# Altium PCB Template_Manufact.PcbDoc (part 1 of 2)
Units mm, origin at the board's own origin, x right, y up, seen from the top; angles counter-clockwise.
Board outline 196 x 280 mm, 2 copper layers (Top Layer, Bottom Layer); 129 components, 42 nets, 507 pads, 102 vias.
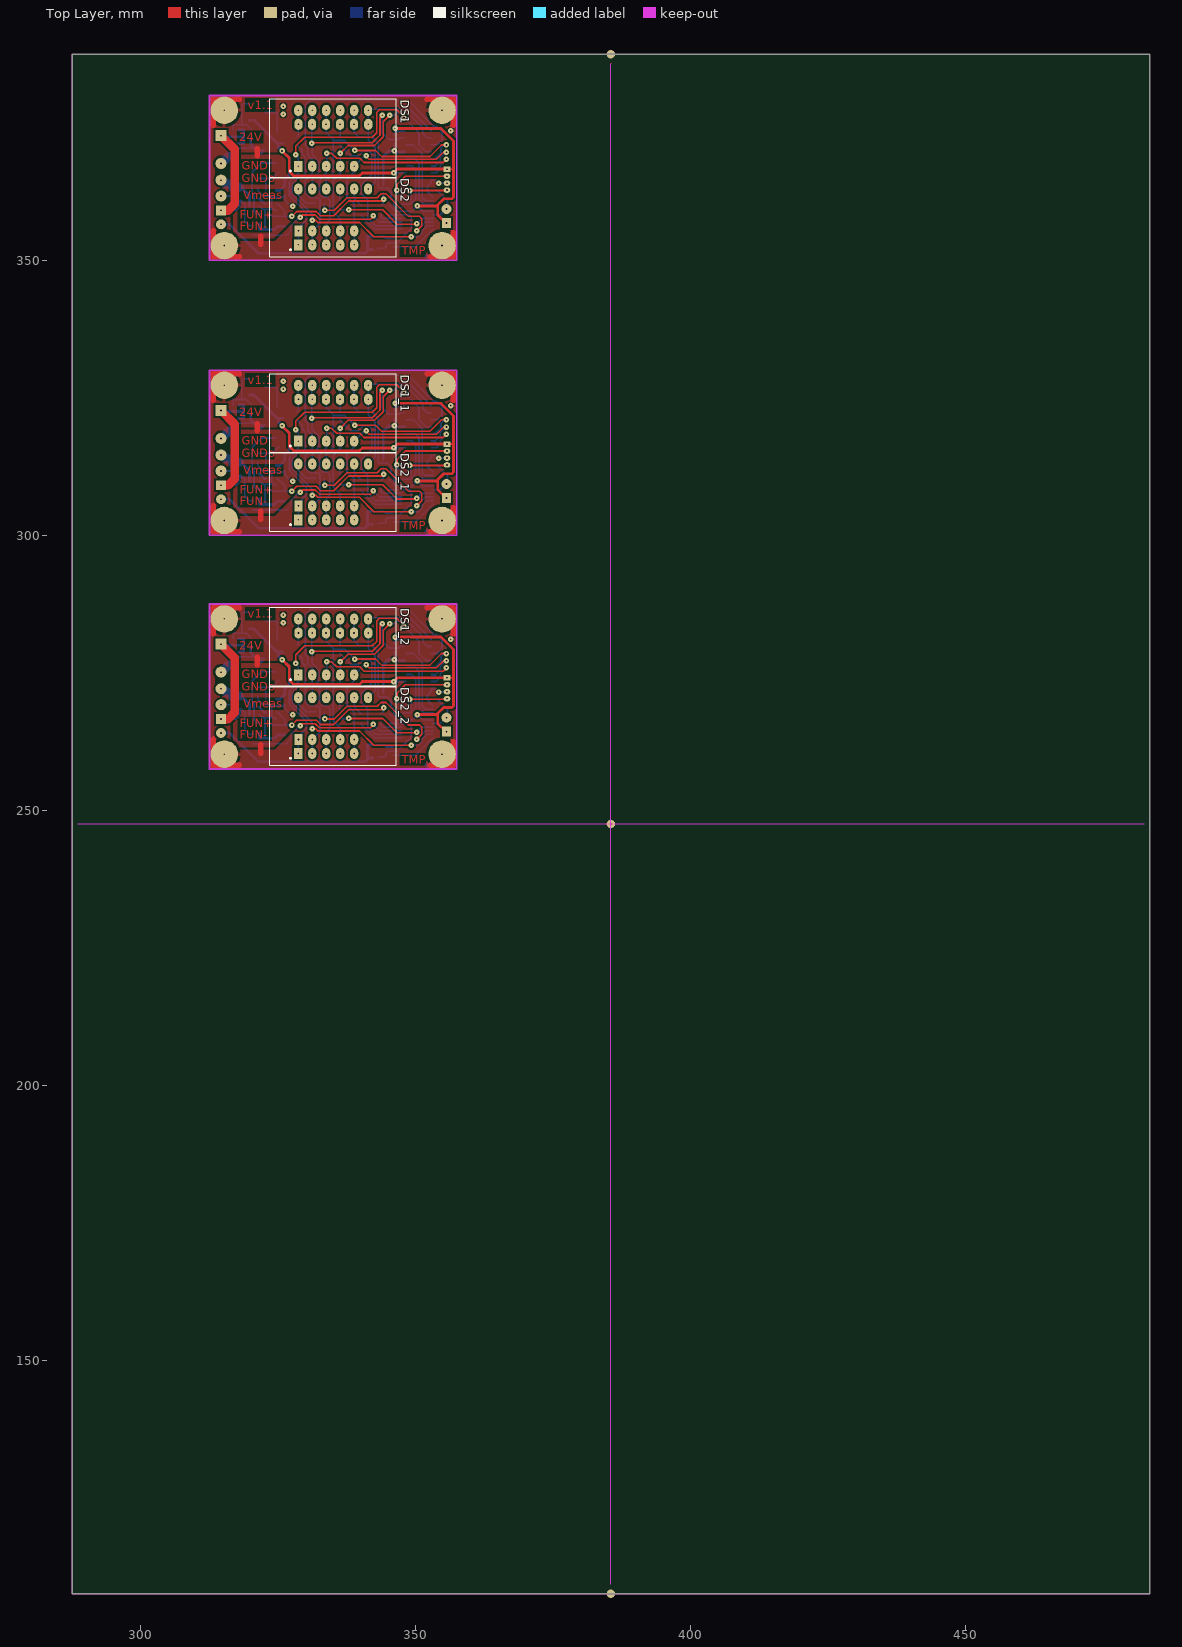
[diagram p0: Top Layer view]
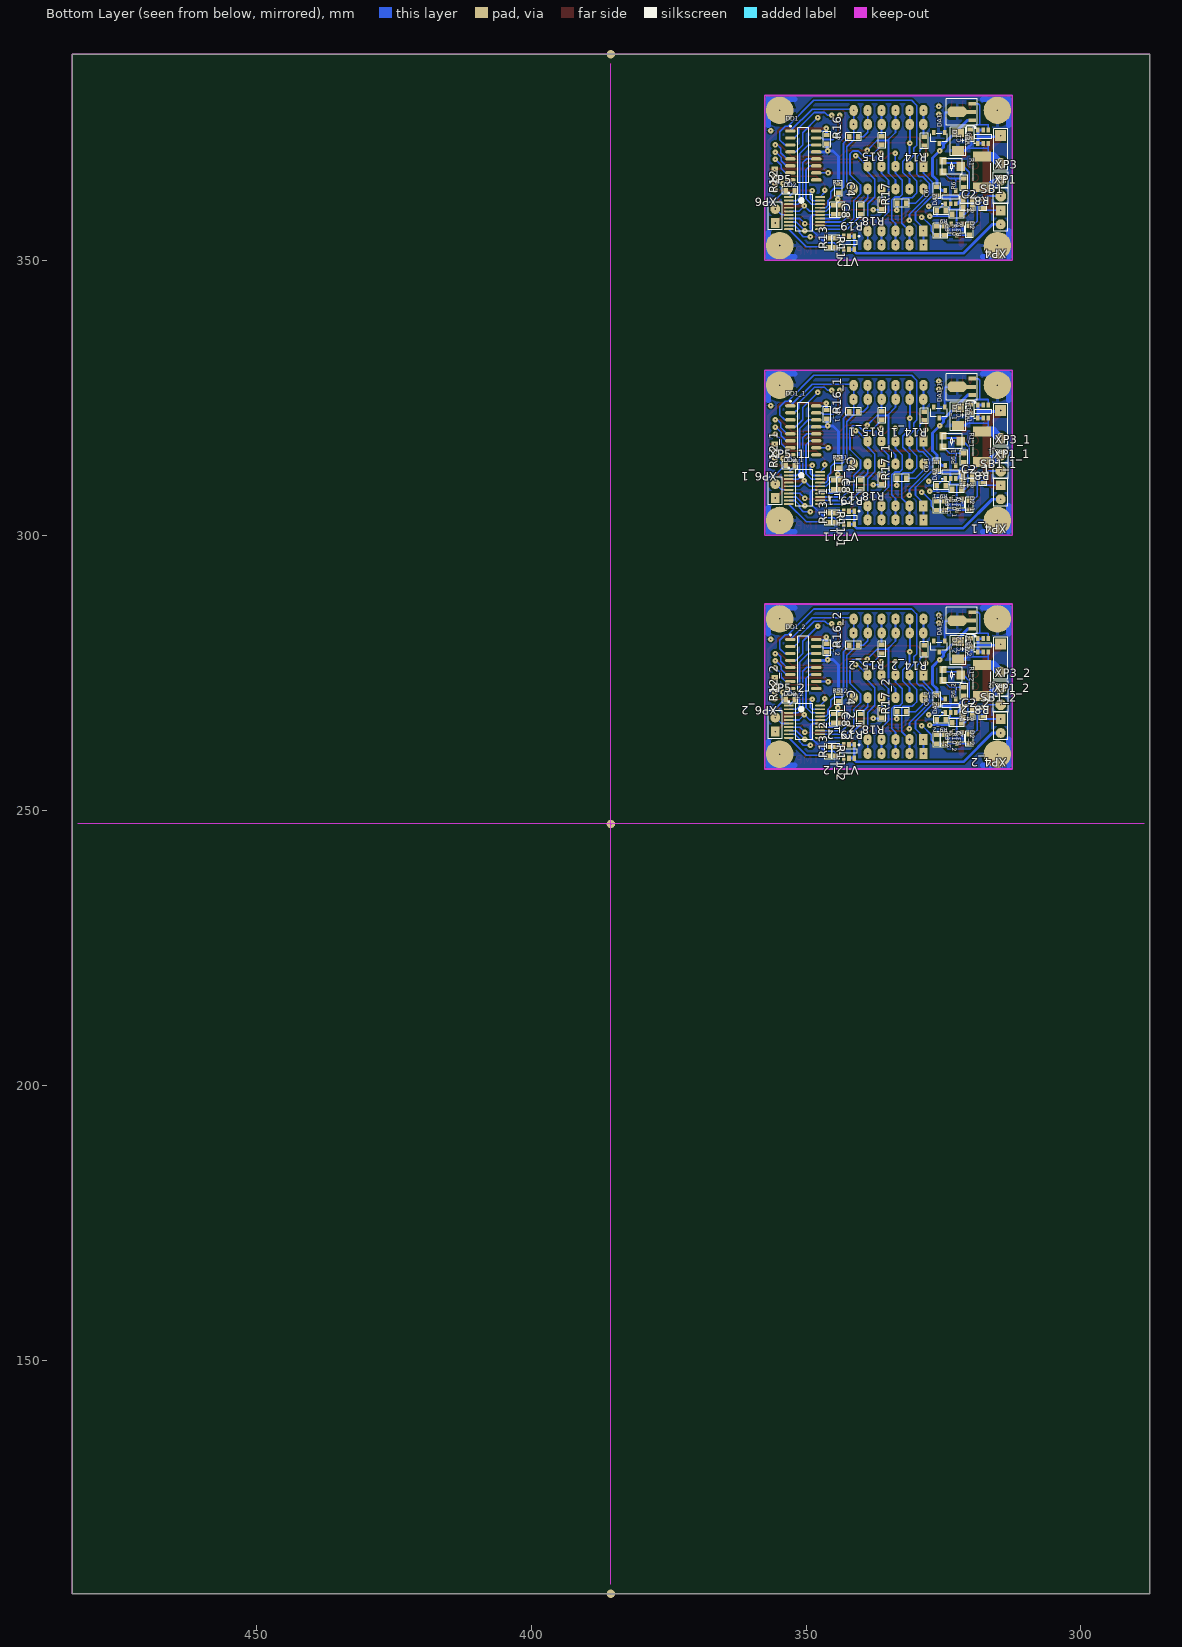
[diagram p1: Bottom Layer view, seen from below]

## Layer stack, top to bottom
Top Solder: solder mask 0.0102, Solder Resist, Dk 3.5
Top Layer: signal copper 0.0356
Dielectric 1: dielectric 0.32, FR-4, Dk 4.8
Bottom Layer: signal copper 0.0356
Bottom Solder: solder mask 0.0102, Solder Resist, Dk 3.5

## Board outline
287.5,107.5 287.5,387.5 483.5,387.5 483.5,107.5

## Design rules (kind name [scope] priority, off if disabled: settings)
Clearance Cl-nce_Poly-Pads&Vias [InPolygon vs ispad or isvia or istrack or isregion] p1: gap=0.4 ignorepadtopadclearanceinfootprint=FALSE except(0: Arc-Hole Track-Hole SMDPad-Hole THPad-Hole Via-Hole Fill-Hole Poly-Hole Region-Hole Text-Hole)
Clearance [All] p2: gap=0.2 ignorepadtopadclearanceinfootprint=FALSE except(0: Arc-Hole Track-Hole SMDPad-Hole THPad-Hole Via-Hole Fill-Hole Poly-Hole Region-Hole Text-Hole)
HoleSize [All] p1: absolutevalues=TRUE maxlimit=5 minlimit=0.025 maxpercent=80.000 minpercent=20.000
MinimumSolderMaskSliver [All] p1: minsoldermaskwidth=0.02
PlaneClearance [All] p1: clearance=0.1
PolygonConnect PCon_fill [All vs isregion or isfill] p1 off: connectstyle=Direct reliefconductorwidth=0.254 reliefentries=4 polygonreliefangle="90 Angle" airgapwidth=0.254
PolygonConnect PCon_via [All vs isvia] p2: connectstyle=Relief reliefconductorwidth=0.3 reliefentries=4 polygonreliefangle="90 Angle" airgapwidth=0.25
PolygonConnect [All] p3: connectstyle=Relief reliefconductorwidth=0.5 reliefentries=4 polygonreliefangle="90 Angle" airgapwidth=0.5
RoutingVias [All] p1: holewidth=0.711 width=1.27 viastyle="Through Hole" minholewidth=0.711 minwidth=1.27 maxholewidth=0.711 maxwidth=1.27
SilkToBoardRegionClearance [All] p1 off:
SilkToSilkClearance [All] p1 off: silktosilkclearance=0.09
SilkToSolderMaskClearance [IsPad] p1 off: minsilkscreentomaskgap=0.09 clearancetoexposedcopper=TRUE
SolderMaskExpansion [All] p1: expansion=0.102
Width [All] p1: maxlimit=2.5 minlimit=0.2 preferedwidth=0.254
24 further rules are at their usual default settings.

## Components (designator, comment, footprint, x,y, rotation, side; value= is the part's Value field where it differs from the comment)
C1 "0.1uF" "CAP 0603_N" 320.1,373 r90 bottom
C1_1 "0.1uF" "CAP 0603_N" 320.1,323 r90 bottom (schematic designator C1)
C1_2 "0.1uF" "CAP 0603_N" 320.1,280.5 r90 bottom (schematic designator C1)
C2 "0.1" "CAP 0603_N" 320.6,359.7 r180 bottom
C2_1 "0.1" "CAP 0603_N" 320.6,309.7 r180 bottom (schematic designator C2)
C2_2 "0.1" "CAP 0603_N" 320.6,267.2 r180 bottom (schematic designator C2)
C3 "0.1uF" "CAP 0603_N" 326.2,355.4 r270 bottom
C3_1 "0.1uF" "CAP 0603_N" 326.2,305.4 r270 bottom (schematic designator C3)
C3_2 "0.1uF" "CAP 0603_N" 326.2,262.9 r270 bottom (schematic designator C3)
C4 "0.1" "CAP 0603_N" 344.1,363.1 r270 bottom
C4_1 "0.1" "CAP 0603_N" 344.1,313.1 r270 bottom (schematic designator C4)
C4_2 "0.1" "CAP 0603_N" 344.1,270.6 r270 bottom (schematic designator C4)
C5 "100uF 6V3" CAP_TANT_B_TYPE_3528-21 322.4,371.6 r270 bottom
C5_1 "100uF 6V3" CAP_TANT_B_TYPE_3528-21 322.4,321.6 r270 bottom (schematic designator C5)
C5_2 "100uF 6V3" CAP_TANT_B_TYPE_3528-21 322.4,279.1 r270 bottom (schematic designator C5)
C6 "0.1" "CAP 0603_N" 326.2,362.6 r90 bottom
C6_1 "0.1" "CAP 0603_N" 326.2,312.6 r90 bottom (schematic designator C6)
C6_2 "0.1" "CAP 0603_N" 326.2,270.1 r90 bottom (schematic designator C6)
C7 "0.1" "CAP 0603_N" 346.2,372 r270 bottom
C7_1 "0.1" "CAP 0603_N" 346.2,322 r270 bottom (schematic designator C7)
C7_2 "0.1" "CAP 0603_N" 346.2,279.5 r270 bottom (schematic designator C7)
C8 "0.1" "CAP 0603_N" 345,359.2 r270 bottom
C8_1 "0.1" "CAP 0603_N" 345,309.2 r270 bottom (schematic designator C8)
C8_2 "0.1" "CAP 0603_N" 345,266.7 r270 bottom (schematic designator C8)
D1 "BZX84C3V6" SOT-23_L 325.8,372.3 r270 bottom
D1_1 "BZX84C3V6" SOT-23_L 325.8,322.3 r270 bottom (schematic designator D1)
D1_2 "BZX84C3V6" SOT-23_L 325.8,279.8 r270 bottom (schematic designator D1)
D2 "BZX84-3V6" SOT-23_L 322.6,355.6 r270 bottom
D2_1 "BZX84-3V6" SOT-23_L 322.6,305.6 r270 bottom (schematic designator D2)
D2_2 "BZX84-3V6" SOT-23_L 322.6,263.1 r270 bottom (schematic designator D2)
DA1 "L78L33ABUTR" SOT-89 320,377 r90 bottom
DA1_1 "L78L33ABUTR" SOT-89 320,327 r90 bottom (schematic designator DA1)
DA1_2 "L78L33ABUTR" SOT-89 320,284.5 r90 bottom (schematic designator DA1)
DA2 "MCP6001" SOT-23-5_L 323.7,361.5 r90 bottom
DA2_1 "MCP6001" SOT-23-5_L 323.7,311.5 r90 bottom (schematic designator DA2)
DA2_2 "MCP6001" SOT-23-5_L 323.7,269 r90 bottom (schematic designator DA2)
DD1 "74HC595D SMD" SOIC-16_L 350.5,369.1 r180 bottom
DD1_1 "74HC595D SMD" SOIC-16_L 350.5,319.1 r180 bottom (schematic designator DD1)
DD1_2 "74HC595D SMD" SOIC-16_L 350.5,276.6 r180 bottom (schematic designator DD1)
DD2 "STM32F030F4P6" TSSOP-20_N 350.3,358.6 r180 bottom
DD2_1 "STM32F030F4P6" TSSOP-20_N 350.3,308.6 r180 bottom (schematic designator DD2)
DD2_2 "STM32F030F4P6" TSSOP-20_N 350.3,266.1 r180 bottom (schematic designator DD2)
DS1 "7SEGM_KEM-3631-AG" 7SEGM_KEM-3631-AG_BLUE 335,372.2 r0 top locked
DS1_1 "7SEGM_KEM-3631-AG" 7SEGM_KEM-3631-AG_BLUE 335,322.2 r0 top locked (schematic designator DS1)
DS1_2 "7SEGM_KEM-3631-AG" 7SEGM_KEM-3631-AG_BLUE 335,279.7 r0 top locked (schematic designator DS1)
DS2 "7SEGM_KEM-3631-AG" 7SEGM_KEM-3631-AG_RED 335,357.9 r0 top locked
DS2_1 "7SEGM_KEM-3631-AG" 7SEGM_KEM-3631-AG_RED 335,307.9 r0 top locked (schematic designator DS2)
DS2_2 "7SEGM_KEM-3631-AG" 7SEGM_KEM-3631-AG_RED 335,265.4 r0 top locked (schematic designator DS2)
R1 "10k" "RES VAR 1" 323.5,367.1 r270 bottom
R1_1 "10k" "RES VAR 1" 323.5,317.1 r270 bottom (schematic designator R1)
R1_2 "10k" "RES VAR 1" 323.5,274.6 r270 bottom (schematic designator R1)
R2 "36k" "RES 0603_N" 322.6,358.4 r0 bottom
R2_1 "36k" "RES 0603_N" 322.6,308.4 r0 bottom (schematic designator R2)
R2_2 "36k" "RES 0603_N" 322.6,265.9 r0 bottom (schematic designator R2)
R3 "100k" "RES 0603_N" 320.3,355.5 r90 bottom
R3_1 "100k" "RES 0603_N" 320.3,305.5 r90 bottom (schematic designator R3)
R3_2 "100k" "RES 0603_N" 320.3,263 r90 bottom (schematic designator R3)
R4 "100" "RES 0603_N" 320.6,361 r0 bottom
R4_1 "100" "RES 0603_N" 320.6,311 r0 bottom (schematic designator R4)
R4_2 "100" "RES 0603_N" 320.6,268.5 r0 bottom (schematic designator R4)
R5 "10k" "RES 0603_N" 343.7,359.2 r90 bottom
R5_1 "10k" "RES 0603_N" 343.7,309.2 r90 bottom (schematic designator R5)
R5_2 "10k" "RES 0603_N" 343.7,266.7 r90 bottom (schematic designator R5)
R6 "300" "RES 0603_N" 321.3,364.1 r90 bottom
R6_1 "300" "RES 0603_N" 321.3,314.1 r90 bottom (schematic designator R6)
R6_2 "300" "RES 0603_N" 321.3,271.6 r90 bottom (schematic designator R6)
R8 "0.02" "RES 2512" 318,366.1 r270 bottom
R8_1 "0.02" "RES 2512" 318,316.1 r270 bottom (schematic designator R8)
R8_2 "0.02" "RES 2512" 318,273.6 r270 bottom (schematic designator R8)
R9 "10k" "RES 0603_N" 325.4,359 r0 bottom
R9_1 "10k" "RES 0603_N" 325.4,309 r0 bottom (schematic designator R9)
R9_2 "10k" "RES 0603_N" 325.4,266.5 r0 bottom (schematic designator R9)
R10 "15k" "RES 0603_N" 324.9,355.4 r270 bottom
R10_1 "15k" "RES 0603_N" 324.9,305.4 r270 bottom (schematic designator R10)
R10_2 "15k" "RES 0603_N" 324.9,262.9 r270 bottom (schematic designator R10)
R11 "47" "RES 0603_N" 345.9,353.2 r270 bottom
R11_1 "47" "RES 0603_N" 345.9,303.2 r270 bottom (schematic designator R11)
R11_2 "47" "RES 0603_N" 345.9,260.7 r270 bottom (schematic designator R11)
R12 "33k" "RES 0603_N" 352.9,362.7 r0 bottom
R12_1 "33k" "RES 0603_N" 352.9,312.7 r0 bottom (schematic designator R12)
R12_2 "33k" "RES 0603_N" 352.9,270.2 r0 bottom (schematic designator R12)
R13 "100k" "RES 0603_N" 344.6,353.2 r90 bottom
R13_1 "100k" "RES 0603_N" 344.6,303.2 r90 bottom (schematic designator R13)
R13_2 "100k" "RES 0603_N" 344.6,260.7 r90 bottom (schematic designator R13)
R14 "47" "RES 0603_N" 328.5,371.7 r270 bottom
R14_1 "47" "RES 0603_N" 328.5,321.7 r270 bottom (schematic designator R14)
R14_2 "47" "RES 0603_N" 328.5,279.2 r270 bottom (schematic designator R14)
R15 "47" "RES 0603_N" 336.2,371.8 r270 bottom
R15_1 "47" "RES 0603_N" 336.2,321.8 r270 bottom (schematic designator R15)
R15_2 "47" "RES 0603_N" 336.2,279.3 r270 bottom (schematic designator R15)
R16 "47" "RES 0603_N" 341.35,372.5 r0 bottom
R16_1 "47" "RES 0603_N" 341.35,322.5 r0 bottom (schematic designator R16)
R16_2 "47" "RES 0603_N" 341.35,280 r0 bottom (schematic designator R16)
R17 "47" "RES 0603_N" 332.6,360.4 r0 bottom
R17_1 "47" "RES 0603_N" 332.6,310.4 r0 bottom (schematic designator R17)
R17_2 "47" "RES 0603_N" 332.6,267.9 r0 bottom (schematic designator R17)
R18 "47" "RES 0603_N" 336.2,360.1 r270 bottom
R18_1 "47" "RES 0603_N" 336.2,310.1 r270 bottom (schematic designator R18)
R18_2 "47" "RES 0603_N" 336.2,267.6 r270 bottom (schematic designator R18)
R19 "47" "RES 0603_N" 340.1,359.2 r270 bottom
R19_1 "47" "RES 0603_N" 340.1,309.2 r270 bottom (schematic designator R19)
R19_2 "47" "RES 0603_N" 340.1,266.7 r270 bottom (schematic designator R19)
SB1 "Source" JUMPER_SOLDERED 317.8,360.2 r90 bottom
SB1_1 "Source" JUMPER_SOLDERED 317.8,310.2 r90 bottom (schematic designator SB1)
SB1_2 "Source" JUMPER_SOLDERED 317.8,267.7 r90 bottom (schematic designator SB1)
VT1 "IRLMS6802T" SOT-23-6_L 317.8,372.5 r90 bottom
VT1_1 "IRLMS6802T" SOT-23-6_L 317.8,322.5 r90 bottom (schematic designator VT1)
VT1_2 "IRLMS6802T" SOT-23-6_L 317.8,280 r90 bottom (schematic designator VT1)
VT2 "IRLTS6342" TSOP-6 342.2,353.2 r0 bottom
VT2_1 "IRLTS6342" TSOP-6 342.2,303.2 r0 bottom (schematic designator VT2)
VT2_2 "IRLTS6342" TSOP-6 342.2,260.7 r0 bottom (schematic designator VT2)
XP1 "USENSE" CON_PIN 314.6,361.7 r180 bottom
XP1_1 "USENSE" CON_PIN 314.6,311.7 r180 bottom (schematic designator XP1)
XP1_2 "USENSE" CON_PIN 314.6,269.2 r180 bottom (schematic designator XP1)
XP2 "Input" CON_5.08MM_1X2 314.6,372.7 r270 bottom
XP2_1 "Input" CON_5.08MM_1X2 314.6,322.7 r270 bottom (schematic designator XP2)
XP2_2 "Input" CON_5.08MM_1X2 314.6,280.2 r270 bottom (schematic designator XP2)
XP3 "Output" CON_PIN 314.6,364.6 r270 bottom
XP3_1 "Output" CON_PIN 314.6,314.6 r270 bottom (schematic designator XP3)
XP3_2 "Output" CON_PIN 314.6,272.1 r270 bottom (schematic designator XP3)
XP4 "Fun" CON_2.54MM_1X2#1 314.6,359.1 r270 bottom
XP4_1 "Fun" CON_2.54MM_1X2#1 314.6,309.1 r270 bottom (schematic designator XP4)
XP4_2 "Fun" CON_2.54MM_1X2#1 314.6,266.6 r270 bottom (schematic designator XP4)
XP5 "Temp" CON_2.54MM_1X2#2 355.6,356.8 r90 bottom
XP5_1 "Temp" CON_2.54MM_1X2#2 355.6,306.8 r90 bottom (schematic designator XP5)
XP5_2 "Temp" CON_2.54MM_1X2#2 355.6,264.3 r90 bottom (schematic designator XP5)
XP6 "SWD" CON_1.27MM_1X4_SWD 355.7,366.6 r270 bottom
XP6_1 "SWD" CON_1.27MM_1X4_SWD 355.7,316.6 r270 bottom (schematic designator XP6)
XP6_2 "SWD" CON_1.27MM_1X4_SWD 355.7,274.1 r270 bottom (schematic designator XP6)

## Footprints (in the part's own frame and the unit in brackets; to place one, negate y for a bottom-side part, rotate by r counter-clockwise, add the part's x,y. Pads: shape width x height; smd on the part's side, far side on the other; paste and mask are expansions set on the pad)
7SEGM_KEM-3631-AG_BLUE [mm] "LED, 7-Segment Display, 7.62 mm, RHD; 10 Leads; Row Space 5.08 mm; Pitch 2.54 mm"
  rect 1.5x2 hole 0.3: 1(-6.35,-5.08)
  oval 1.5x2 hole 0.3: 2(-3.81,-5.08) 3(-1.27,-5.08) 4(1.27,-5.08) 5(3.81,-5.08) 7(6.35,5.08) 8(3.81,5.08) 9(1.27,5.08) 10(-1.27,5.08) 11(-3.81,5.08) 12(-6.35,5.08)
  silkscreen extent -11.5,-7.2 11.5,7.2, body extent -11.3,-7.05 11.3,7.05, height 8.21
7SEGM_KEM-3631-AG_RED [mm] "LED, 7-Segment Display, 7.62 mm, RHD; 10 Leads; Row Space 5.08 mm; Pitch 2.54 mm"
  rect 1.5x2 hole 0.3: 1(-6.35,-5.08)
  oval 1.5x2 hole 0.3: 2(-3.81,-5.08) 3(-1.27,-5.08) 4(1.27,-5.08) 5(3.81,-5.08) 7(6.35,5.08) 8(3.81,5.08) 9(1.27,5.08) 10(-1.27,5.08) 11(-3.81,5.08) 12(-6.35,5.08)
  silkscreen extent -11.5,-7.2 11.5,7.2, body extent -11.3,-7.05 11.3,7.05, height 7.2
"CAP 0603_N" [mm] "Chip Capacitor; Body 1.6 x 0.8 mm (LxW typ)"
  rect 0.8x1 smd: 1(-0.8,0) 2(0.8,0)
  silkscreen extent -1.4,-0.7 1.4,0.7, body extent -0.8,-0.4 0.8,0.4, height 0.6
CAP_TANT_B_TYPE_3528-21 [mm] "Capacitor, SM Tantalum; Body 3.5 x 2.8 mm (LxW typ)"
  rect 1.6x2.2 smd: 1(-1.6,0) 2(1.6,0)
  silkscreen extent -2.6,-1.4 2.6,1.4, body extent -1.75,-1.4 1.75,1.4, height 1.9
CON_1.27MM_1X4_SWD [mm] "Connector; Header; 4 Position"
  rect 1x1.2 hole 0.3: 1(0,0)
  oval 1x1.2 hole 0.3: 2(1.27,0) 3(2.54,0) 4(3.81,0)
CON_2.54MM_1X2#1 [mm] "Connector; Header; 2 Position"
  rect 1.8x1.8 hole 0.3: 1(0,0)
  round 1.8 hole 0.3: 2(2.54,0)
  silkscreen extent -1.27,-1.27 3.8,1.27, body extent -1.28,-1.27 3.8,1.27, height 8.63
CON_2.54MM_1X2#2 [mm] "Connector; Header; 2 Position"
  rect 1.8x1.6 hole 0.3: 1(0,0)
  round 1.8 hole 0.3: 2(2.54,0)
  silkscreen extent -1.27,-1.27 3.8,1.27, body extent -1.28,-1.27 3.8,1.27, height 8.63
CON_5.08MM_1X2 [mm] "Connector; Header; 2 Position"
  rect 2x2 hole 0.3: 1(0,0)
  round 2 hole 0.3: 2(5.08,0)
  silkscreen extent -1.27,-1.27 6.35,1.27, body extent -1.27,-1.27 6.35,1.27, height 8.5
CON_PIN [mm] "Connector; Plug"
  round 2 hole 0.3: 1(0,0)
  silkscreen extent -1.4,-1.4 1.4,1.4, body extent -1.27,-1.27 1.27,1.27, height 8.85
JUMPER_SOLDERED [mm] "Chip Resistor, Body 2.0x1.2mm, IPC Low Density"
  rect 0.65x1 smd: 1(-0.675,0)
  rect 0.5x1 smd: 2(0.75,0)
  Top Layer region: -0.4,-0.5 -0.4,0.5 -0.325,0.5 -0.325,0.5 0.175,0 -0.325,-0.5
  Top Layer region: -0.025,0.5 -0.025,0.5 0.475,0 -0.025,-0.5 0.525,-0.5 0.525,0.5
  silkscreen extent -1.2,-0.7 1.2,0.7
"RES 0603_N" [mm] "Chip Resistor, Body 2.0x1.2mm, IPC Low Density"
  rect 0.8x1 smd: 1(-0.8,0) 2(0.8,0)
  silkscreen extent -1.4,-0.7 1.4,0.7, body extent -0.85,-0.4 0.85,0.4, height 0.56
"RES 2512" [mm] "Chip Resistor; Body 6.3 x 3.2 mm (LxW typ)"
  rect 1.8x3.2 smd: 1(-2.8,0) 2(2.8,0)
  silkscreen extent -1.6,-1.6 1.6,1.6, body extent -3.2,-1.6 3.2,1.6, height 0.6
"RES VAR 1" [mm] "Chip Resistor, Body 2.0x1.2mm, IPC Low Density"
  rect 1.3x1.2 smd: 1(-1.016,-1.6) 3(1.016,-1.6)
  rect 1.6x1.5 smd: 2(0,1.626)
  silkscreen extent -1.4,-1.78 1.4,1.91
SOIC-16_L [mm] "SOIC, 16-Leads, Body 9.9x3.9mm, Pitch 1.27mm, IPC High Density"
  oval 1.9x0.6 smd: 1(-2.35,4.445) 2(-2.35,3.175) 3(-2.35,1.905) 4(-2.35,0.635) 5(-2.35,-0.635) 6(-2.35,-1.905) 7(-2.35,-3.175) 8(-2.35,-4.445) 9(2.35,-4.445) 10(2.35,-3.175) 11(2.35,-1.905) 12(2.35,-0.635) 13(2.35,0.635) 14(2.35,1.905) 15(2.35,3.175) 16(2.35,4.445)
  silkscreen extent -2.48,-5 1,5.42, body extent -3,-4.95 3,4.95, height 1.4
SOT-23-5_L [mm] "SOT23, 5-Leads, Body 2.9x1.7mm, Pitch 0.95mm, Lead Span 2.8mm, IPC High Density"
  rect 0.9x0.65 smd: 1(-1.2,0.95) 2(-1.2,0) 3(-1.2,-0.95) 4(1.2,-0.95) 5(1.2,0.95)
  silkscreen extent -1.28,-1.55 0.35,1.63, body extent -1.5,-1.5 1.5,1.5, height 1.3
SOT-23-6_L [mm] "SOT23, 5-Leads, Body 2.9x1.7mm, Pitch 0.95mm, Lead Span 2.8mm, IPC High Density"
  rect 0.9x0.65 smd: 1(-1.2,0.95) 2(-1.2,0) 3(-1.2,-0.95) 4(1.2,-0.95) 5(1.2,0) 6(1.2,0.95)
  silkscreen extent -1.28,-1.55 0.35,1.63, body extent -1.5,-1.5 1.5,1.5, height 1.3
SOT-23_L [mm] "SOT23, 3-Leads, Body 2.9x1.3mm, Pitch 0.95mm, Lead Span 2.3mm - Reverse Pinning, IPC High Density"
  rect 0.9x0.6 smd: 1(-1,1) 2(-1,-1) 3(1,0)
  silkscreen extent -0.7,-1.5 0.7,1.5, body extent -1.32,-1.5 1.32,1.5, height 1.08
SOT-89 [mm] "SOT-89; Body 4.6 x 4.25 mm, inc. leads (LxW max)"
  rect 0.7x1.35 smd: 1(-1.5,-0.225) 3(1.5,-0.225)
  rect 0.7x1.8 smd: 2(0,0)
  oct 1.9x3.4 smd: 2(0,2.563)
  silkscreen extent -2.94,-1.12 2.4,4.48, body extent -2.25,-0.42 2.25,3.88, height 1.49
TSOP-6 [mm] "SOT-457/SC-74; 6 Leads; Body 3.1 x 2.9 mm, inc. leads (LxW max)"
  rect 0.7x1 smd: 1(-0.95,-1.2) 2(0,-1.2) 3(0.95,-1.2) 4(0.95,1.2) 5(0,1.2) 6(-0.95,1.2)
  silkscreen extent -1.95,-1.32 1.55,0.35, body extent -1.5,-1.5 1.5,1.5, height 1.3
TSSOP-20_N [mm] "SOP, 20-Leads, Body 6.6x4.5mm, Pitch 0.65mm, IPC Medium Density"
  oval 1.8x0.35 smd: 1(-2.85,2.925) 2(-2.85,2.275) 3(-2.85,1.625) 4(-2.85,0.975) 5(-2.85,0.325) 6(-2.85,-0.325) 7(-2.85,-0.975) 8(-2.85,-1.625) 9(-2.85,-2.275) 10(-2.85,-2.925) 11(2.85,-2.925) 12(2.85,-2.275) 13(2.85,-1.625) 14(2.85,-0.975) 15(2.85,-0.325) 16(2.85,0.325) 17(2.85,0.975) 18(2.85,1.625) 19(2.85,2.275) 20(2.85,2.925)
  silkscreen extent -2.98,-3.3 1.55,3.77, body extent -3.27,-3.3 3.28,3.3, height 1.2

## Part data
C1 C1_1 C1_2 C2 C2_1 C2_2 C4 C4_1 C4_2 C6 C6_1 C6_2 C7 C7_1 C7_2 C8 C8_1 C8_2: library part CAP_SMD, "Capacitor SMD"
C3 C3_1 C3_2: library part CAP_SMD
C5 C5_1 C5_2: library part CAP_SMD_TANT, "Capacitor SMD Tantalum"
D1 D1_1 D1_2 D2 D2_1 D2_2: library part BZX84, "Zener Diode", LatestRevisionDate=17-Jul-2002, LatestRevisionNote="Re-released for DXP Platform.", PackageDescription="Diode, Thru-Hole; 2 Leads; 0.7 in Pin Spacing", PackageReference=DIODE-0.7, Published=8-Jun-2000, Publisher="Altium Limited"
DA1 DA1_1 DA1_2: "Vin=30V Positive Voltage Regulator", ComponentLink1Description="Manufacturer Link", ComponentLink1URL=http://www.st.com/, DatasheetVersion=Feb-1999, LatestRevisionDate=17-Jul-2002, LatestRevisionNote="Re-released for DXP Platform.", PackageDescription="TO, Flat Index; 3 In-Line, Axial Leads; Body Dia. 4.8mm; Leads 0.51 x 0.51 mm (max)", PackageReference=TO92, Published=24-Aug-2001, Publisher="Altium Limited"
DA2 DA2_1 DA2_2: "1 MHz, Low-Power Op Amp"
DD1 DD1_1 DD1_2: "8-Bit Shift Register with 3-State Output Registers", Code_IPC=SOIC127P600-16, ComponentLink1Description="Manufacturer Link", ComponentLink1URL=http://www.ti.com/, ComponentLink2Description=Datasheet, ComponentLink2URL=http://www-s.ti.com/sc/ds/sn74hc595.pdf, DatasheetVersion=May-1997, LatestRevisionDate=13-Apr-2006, LatestRevisionNote="IPC-7351 Footprint Added.", PackageDescription="16-Pin Small Outline Integrated Circuit 1.27 mm Pitch", PackageReference=D016, PackageVersion=Jan-1998, Published=8-Jun-2000, Publisher="Altium Limited"
DD2 DD2_1 DD2_2: "Cortex-M0 32-bit MCU, 16 KB Flash, 4 KB Internal RAM, 15 I/Os, 20-pin TSSOP, -40 to 85 degC"
DS1 DS1_1 DS1_2 DS2 DS2_1 DS2_2: "7.62 mm Black Surface Green 7-Segment Display: CC, RH DP", Colour=Green, ComponentLink1Description="Manufacturer Link", ComponentLink1URL=http://www.agilent.com/, DatasheetVersion=19-Feb-2002, LatestRevisionDate=17-Dec-2003, LatestRevisionNote="Schematic revised, PCB Footprint replaced.", MinimumIntensity="860 ucd", Note="IF = 10 mA", PackageDescription="LED, 7-Segment Display, 7.62 mm, RHD; 10 Leads; Row Space 5.08 mm; Pitch 2.54 mm", PackageReference=A, PackageVersion=11-Feb-2002, Published=8-Jun-2000, Publisher="Altium Limited"
R1 R1_1 R1_2: library part RES_SMD_Tap, "Tapped Resistor", LatestRevisionDate=17-Jul-2002, LatestRevisionNote="Re-released for DXP Platform.", PackageDescription="Variable Resistor, Thru-Hole; 3 Leads", PackageReference=VR3, Published=24-Mar-1999, Publisher="Altium Limited", Set Position=0.5, Sim Note="Enter the Resistance value and the set point into parameter fields."
R2 R2_1 R2_2 R4 R4_1 R4_2 R6 R6_1 R6_2 R9 R9_1 R9_2 R14 R14_1 R14_2 R15 R15_1 R15_2 R16 R16_1 R16_2 R17 R17_1 R17_2 R18 R18_1 R18_2 R19 R19_1 R19_2: library part Resistor_SMD
R3 R3_1 R3_2 R10 R10_1 R10_2: library part RES_SMD
R5 R5_1 R5_2 R8 R8_1 R8_2: library part RES_SMD, "Resistor"
R11 R11_1 R11_2 R12 R12_1 R12_2 R13 R13_1 R13_2: library part RES_SMD, "Chip Resistor"
SB1 SB1_1 SB1_2: library part Jumper_SMD, "Jumper"
VT1 VT1_1 VT1_2: "P-Channel MOSFET 20V 4.5A", Code_IPC=SOIC127P600-8, Code_JEDEC=MS-012-AA, ComponentLink1Description="Manufacturer Link", ComponentLink1URL=http://www.irf.com/, ComponentLink2Description=Datasheet, ComponentLink2URL=http://www.irf.com/product-info/datasheets/data/irf7416.pdf, DatasheetVersion=Aug-1997, LatestRevisionDate=13-Apr-2006, LatestRevisionNote="IPC-7351 Footprint Added.", PackageDescription="8-Pin Plastic Small Outline Integrated Circuit 1.27 mm Pitch", PackageReference=SO-8, PackageVersion=Feb-2001, Published=8-Jun-2000, Publisher="Altium Limited"
VT2 VT2_1 VT2_2: "30V, 6.7A, 1V N-Channel MOSFET", ComponentLink1Description="Manufacturer Link", ComponentLink1URL=http://www.irf.com/, ComponentLink2Description=Datasheet, ComponentLink2URL=http://www.irf.com/product-info/datasheets/data/irlz34n.pdf, DatasheetVersion=Aug-1997, LatestRevisionDate=17-Jul-2002, LatestRevisionNote="Re-released for DXP Platform.", Note="Pin 2 is electrically connected to pin 4.", PackageDescription="TO, Thru-Hole, Vertical, Heatsink Mounted; 3 In-Line Leads; Pitch 2.54 mm", PackageReference=TO-220AB, PackageVersion=Feb-1997, Published=8-Jun-2000, Publisher="Altium Limited"
XP1 XP1_1 XP1_2 XP3 XP3_1 XP3_2: library part CON_1x1_PIN, "Plug papa", LatestRevisionDate=17-Jul-2002, LatestRevisionNote="Re-released for DXP Platform.", Publisher="Altium Limited"
XP2 XP2_1 XP2_2: library part CON_5.08mm_1x2, "Header, 2-Pin", LatestRevisionDate=17-Jul-2002, LatestRevisionNote="Re-released for DXP Platform.", Publisher="Altium Limited"
XP4 XP4_1 XP4_2 XP5 XP5_1 XP5_2: library part CON_2.54mm_1x2, "Header, 2-Pin", LatestRevisionDate=17-Jul-2002, LatestRevisionNote="Re-released for DXP Platform.", Publisher="Altium Limited"
XP6 XP6_1 XP6_2: library part CON_1.27mm_1x4_SWD, "Header, 3-Pin", LatestRevisionDate=17-Jul-2002, LatestRevisionNote="Re-released for DXP Platform.", Publisher="Altium Limited"

## Free pads (board coordinates)
  round 5 hole 0.3: 0(315.2,284.8) 0(315.2,327.3) 0(315.2,377.3) 0(315.2,260.2) 0(315.2,302.7) 0(315.2,352.7) 0(354.8,284.8) 0(354.8,327.3) 0(354.8,377.3) 0(354.8,260.2) 0(354.8,302.7) 0(354.8,352.7)
  round 1.524 hole 0.3: 0(385.5,107.5) 0(385.5,247.5) 0(385.5,387.5)
  rect 1.5x2 hole 0.3: 1(328.7,262.86) 1(328.7,305.36) 1(328.7,355.36)
  oval 1.5x2 hole 0.3: 5(328.65,260.32) 5(328.65,302.82) 5(328.65,352.82) 5(331.19,262.86) 5(331.19,305.36) 5(331.19,355.36) 5(333.73,262.86) 5(333.73,305.36) 5(333.73,355.36) 5(336.27,262.86) 5(336.27,305.36) 5(336.27,355.36) 5(338.81,262.86) 5(338.81,305.36) 5(338.81,355.36) 11(331.16,282.24) 11(331.16,324.74) 11(331.16,374.74) 11(333.7,282.24) 11(333.7,324.74) 11(333.7,374.74) 11(336.24,282.24) 11(336.24,324.74) 11(336.24,374.74) 11(338.78,282.24) 11(338.78,324.74) 11(338.78,374.74) 11(341.38,282.24) 11(341.38,324.74) 11(341.38,374.74) 12(328.68,282.24) 12(328.68,324.74) 12(328.68,374.74)

## Via types
v1: diameter 1, hole 0.3, Top Layer to Bottom Layer, 102 vias

## Nets (pads, with @x,y where several pads share a name; then routed paths per layer and width w, separated by ;. In a path a pad name is that pad's centre, name@x,y a point inside that pad or via, vN(x,y) a via of type N, cw(c..) or ccw(c..) an arc to the next point about the centre after c; other vN are vias at no path point)
3V3: 
A\C\X\: 
ACX: 
AGND: 
AIN+: 
AIN-: 
BLOCK: 
GND: 
GND-EARTH: 
I2CSCL: 
I2CSDA: 
MISO: 
MOSI: 
NetC6_2: 
NetC7_2: 
NetC8_2: 
NetC17_1: 
NetC23_1: 
NetC24_2: 
NetD2_1: 
NetD3_1: 
NetR2_1: 
NetR3_2: 
NetR4_1: 
NetR5_2: 
NetR12_1: 
NetR14_2: 
NetR17_2: 
ON: 
OUT_A: 
OUT_B: 
RDY: 
RST: 
SCLK: 
STBM: 
SWCLK: 
SWDIO: 
V_BAT: 
VCC: 
VCC_A: 
VREF+: 
VREF-: 
pads on no net: C1.1 C1.2 C1_1.1 C1_1.2 C1_2.1 C1_2.2 C2.1 C2.2 C2_1.1 C2_1.2 C2_2.1 C2_2.2 C3.1 C3.2 C3_1.1 C3_1.2 C3_2.1 C3_2.2 C4.1 C4.2 C4_1.1 C4_1.2 C4_2.1 C4_2.2 C5.1 C5.2 C5_1.1 C5_1.2 C5_2.1 C5_2.2 C6.1 C6.2 C6_1.1 C6_1.2 C6_2.1 C6_2.2 C7.1 C7.2 C7_1.1 C7_1.2 C7_2.1 C7_2.2 C8.1 C8.2 C8_1.1 C8_1.2 C8_2.1 C8_2.2 D1.1 D1.2 D1.3 D1_1.1 D1_1.2 D1_1.3 D1_2.1 D1_2.2 D1_2.3 D2.1 D2.2 D2.3 D2_1.1 D2_1.2 D2_1.3 D2_2.1 D2_2.2 D2_2.3 DA1.1 DA1.2 DA1.3 DA1_1.1 DA1_1.2 DA1_1.3 DA1_2.1 DA1_2.2 DA1_2.3 DA2.1 DA2.2 DA2.3 DA2.4 DA2.5 DA2_1.1 DA2_1.2 DA2_1.3 DA2_1.4 DA2_1.5 DA2_2.1 DA2_2.2 DA2_2.3 DA2_2.4 DA2_2.5 DD1.1 DD1.2 DD1.3 DD1.4 DD1.5 DD1.6 DD1.7 DD1.8 DD1.9 DD1.10 DD1.11 DD1.12 DD1.13 DD1.14 DD1.15 DD1.16 DD1_1.1 DD1_1.2 DD1_1.3 DD1_1.4 DD1_1.5 DD1_1.6 DD1_1.7 DD1_1.8 DD1_1.9 DD1_1.10 DD1_1.11 DD1_1.12 DD1_1.13 DD1_1.14 DD1_1.15 DD1_1.16 DD1_2.1 DD1_2.2 DD1_2.3 DD1_2.4 DD1_2.5 DD1_2.6 DD1_2.7 DD1_2.8 DD1_2.9 DD1_2.10 DD1_2.11 DD1_2.12 DD1_2.13 DD1_2.14 DD1_2.15 DD1_2.16 DD2.1 DD2.2 DD2.3 DD2.4 DD2.5 DD2.6 DD2.7 DD2.8 DD2.9 DD2.10 DD2.11 DD2.12 DD2.13 DD2.14 DD2.15 DD2.16 DD2.17 DD2.18 DD2.19 DD2.20 DD2_1.1 DD2_1.2 DD2_1.3 DD2_1.4 DD2_1.5 DD2_1.6 DD2_1.7 DD2_1.8 DD2_1.9 DD2_1.10 DD2_1.11 DD2_1.12 DD2_1.13 DD2_1.14 DD2_1.15 DD2_1.16 DD2_1.17 DD2_1.18 DD2_1.19 DD2_1.20 DD2_2.1 DD2_2.2 DD2_2.3 DD2_2.4 DD2_2.5 DD2_2.6 DD2_2.7 DD2_2.8 DD2_2.9 DD2_2.10 DD2_2.11 DD2_2.12 DD2_2.13 DD2_2.14 DD2_2.15 DD2_2.16 DD2_2.17 DD2_2.18 DD2_2.19 DD2_2.20 DS1.1 DS1.2 DS1.3 DS1.4 DS1.5 DS1.7 DS1.8 DS1.9 DS1.10 DS1.11 DS1.12 DS1_1.1 DS1_1.2 DS1_1.3 DS1_1.4 DS1_1.5 DS1_1.7 DS1_1.8 DS1_1.9 DS1_1.10 DS1_1.11 DS1_1.12 DS1_2.1 DS1_2.2 DS1_2.3 DS1_2.4 DS1_2.5 DS1_2.7 DS1_2.8 DS1_2.9 DS1_2.10 DS1_2.11 DS1_2.12 DS2.1 DS2.2 DS2.3 DS2.4 DS2.5 DS2.7 DS2.8 DS2.9 DS2.10 DS2.11 DS2.12 DS2_1.1 DS2_1.2 DS2_1.3 DS2_1.4 DS2_1.5 DS2_1.7 DS2_1.8 DS2_1.9 DS2_1.10 DS2_1.11 DS2_1.12 DS2_2.1 DS2_2.2 DS2_2.3 DS2_2.4 DS2_2.5 DS2_2.7 DS2_2.8 DS2_2.9 DS2_2.10 DS2_2.11 DS2_2.12 R1.1 R1.2 R1.3 R1_1.1 R1_1.2 R1_1.3 R1_2.1 R1_2.2 R1_2.3 R2.1 R2.2 R2_1.1 R2_1.2 R2_2.1 R2_2.2 R3.1 R3.2 R3_1.1 R3_1.2 R3_2.1 R3_2.2 R4.1 R4.2 R4_1.1 R4_1.2 R4_2.1 R4_2.2 R5.1 R5.2 R5_1.1 R5_1.2 R5_2.1 R5_2.2 R6.1 R6.2 R6_1.1 R6_1.2 R6_2.1 R6_2.2 R8.1 R8.2 R8_1.1 R8_1.2 R8_2.1 R8_2.2 R9.1 R9.2 R9_1.1 R9_1.2 R9_2.1 R9_2.2 R10.1 R10.2 R10_1.1 R10_1.2 R10_2.1 R10_2.2 R11.1 R11.2 R11_1.1 R11_1.2 R11_2.1 R11_2.2 R12.1 R12.2 R12_1.1 R12_1.2 R12_2.1 R12_2.2 R13.1 R13.2 R13_1.1 R13_1.2 R13_2.1 R13_2.2 R14.1 R14.2 R14_1.1 R14_1.2 R14_2.1 R14_2.2 R15.1 R15.2 R15_1.1 R15_1.2 R15_2.1 R15_2.2 R16.1 R16.2 R16_1.1 R16_1.2 R16_2.1 R16_2.2 R17.1 R17.2 R17_1.1 R17_1.2 R17_2.1 R17_2.2 R18.1 R18.2 R18_1.1 R18_1.2 R18_2.1 R18_2.2 R19.1 R19.2 R19_1.1 R19_1.2 R19_2.1 R19_2.2 SB1.1 SB1.2 SB1_1.1 SB1_1.2 SB1_2.1 SB1_2.2 VT1.1 VT1.2 VT1.3 VT1.4 VT1.5 VT1.6 VT1_1.1 VT1_1.2 VT1_1.3 VT1_1.4 VT1_1.5 VT1_1.6 VT1_2.1 VT1_2.2 VT1_2.3 VT1_2.4 VT1_2.5 VT1_2.6 VT2.1 VT2.2 VT2.3 VT2.4 VT2.5 VT2.6 VT2_1.1 VT2_1.2 VT2_1.3 VT2_1.4 VT2_1.5 VT2_1.6 VT2_2.1 VT2_2.2 VT2_2.3 VT2_2.4 VT2_2.5 VT2_2.6 XP1.1 XP1_1.1 XP1_2.1 XP2.1 XP2.2 XP2_1.1 XP2_1.2 XP2_2.1 XP2_2.2 XP3.1 XP3_1.1 XP3_2.1 XP4.1 XP4.2 XP4_1.1 XP4_1.2 XP4_2.1 XP4_2.2 XP5.1 XP5.2 XP5_1.1 XP5_1.2 XP5_2.1 XP5_2.2 XP6.1 XP6.2 XP6.3 XP6.4 XP6_1.1 XP6_1.2 XP6_1.3 XP6_1.4 XP6_2.1 XP6_2.2 XP6_2.3 XP6_2.4